# Altium PCB BuySellDisplay4.PcbDoc (part 3 of 3)
Units mm, origin at the board's own origin, x right, y up, seen from the top; angles counter-clockwise.
Board outline 355.85 x 151.13 mm, 2 copper layers (Top Layer, Bottom Layer); 219 components, 209 nets, 584 pads, 68 vias.
Unrouted connection lines stored in the file: 3.
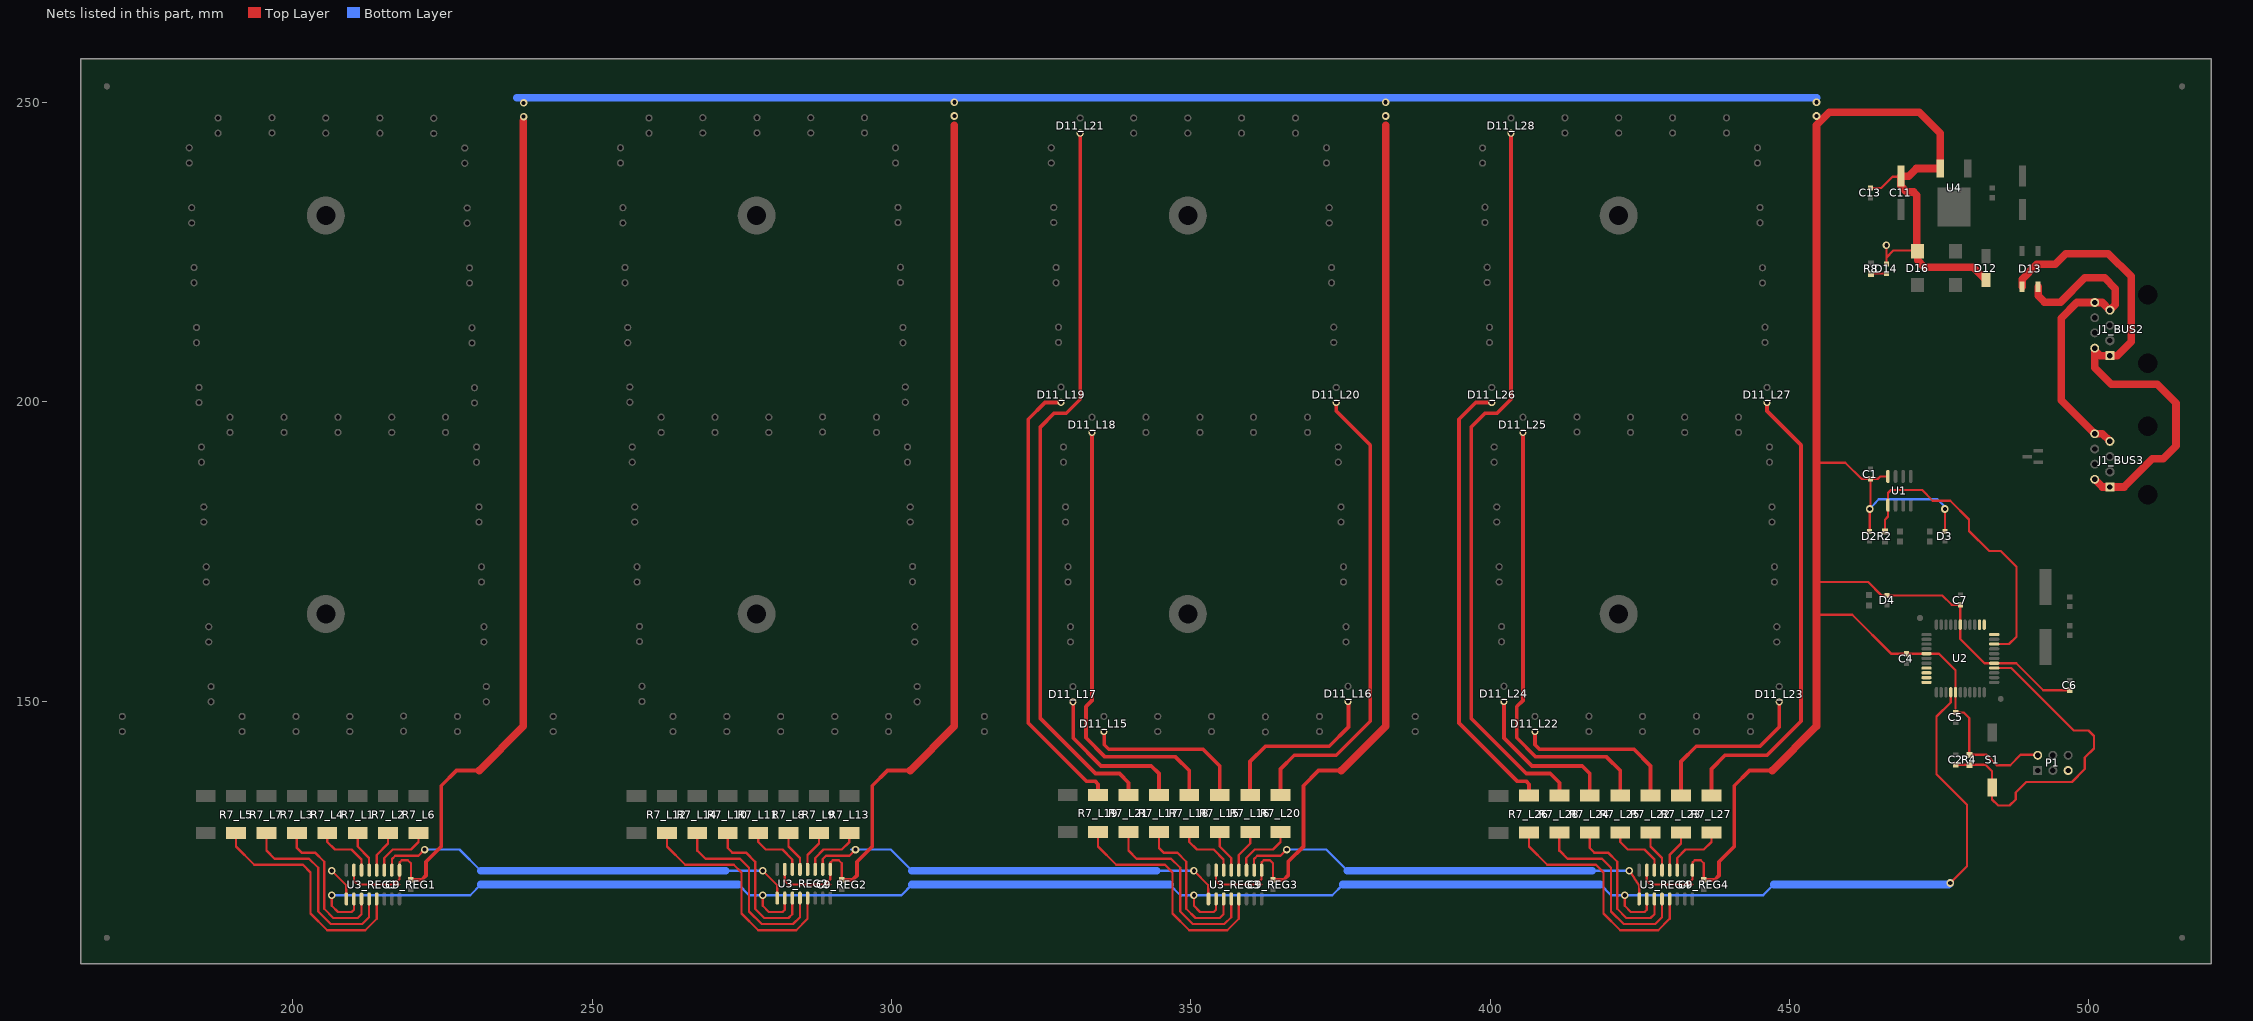
[diagram p3: the nets of this part, all layers, seen from the top]

## Via types
v1: diameter 1.27, hole 0.711, Top Layer to Bottom Layer, 68 vias

## Nets (pads, with @x,y where several pads share a name; then routed paths per layer and width w, separated by ;. In a path a pad name is that pad's centre, name@x,y a point inside that pad or via, vN(x,y) a via of type N, cw(c..) or ccw(c..) an arc to the next point about the centre after c; other vN are vias at no path point) (continued)
NetD11_L15_K: D11_L15.K R7_L15.1 | length 28
  Top Layer w0.635: D11_L15.K@335.534,144.932 335.534,142.748 336.296,141.986 352.044,141.986 354.838,139.192 R7_L15.1@354.838,134.164
NetD11_L16_K: D11_L16.K R7_L16.1 | length 28.8
  Top Layer w0.635: R7_L16.1@359.918,134.164 359.918,139.954 362.458,142.494 373.126,142.494 376.326,145.694 D11_L16.K@376.326,149.911
NetD11_L17_K: D11_L17.K R7_L17.1 | length 26.6
  Top Layer w0.635: D11_L17.K@330.352,149.911 330.352,143.866 335.026,139.192 343.408,139.192 344.678,137.922 R7_L17.1@344.678,134.164
NetD11_L18_K: D11_L18.K R7_L18.1 | length 75.2
  Top Layer w0.635: D11_L18.K@333.502,194.92 333.502,150.114 332.486,149.098 332.486,143.891 335.661,140.716 347.472,140.716 349.758,138.43 R7_L18.1@349.758,134.164
NetD11_L19_K: D11_L19.K R7_L19.1 | length 75.3
  Top Layer w0.635: D11_L19.K@328.32,199.898 325.628,199.898 322.834,197.104 322.834,146.355 332.537,136.652 334.01,136.652 334.518,136.144 R7_L19.1@334.518,134.164
NetD11_L20_K: D11_L20.K R7_L20.1 | length 78.4
  Top Layer w0.635: R7_L20.1@364.998,134.164 364.998,138.684 367.284,140.97 374.294,140.97 379.984,146.66 379.984,192.786 374.294,198.476 D11_L20.K@374.294,199.898
NetD11_L21_K: D11_L21.K R7_L21.1 | length 123.1
  Top Layer w0.635: D11_L21.K@331.521,244.907 331.521,200.457 329.184,198.12 327.152,198.12 324.866,195.834 324.866,147.117 334.061,137.922 338.074,137.922 339.598,136.398 R7_L21.1@339.598,134.164
NetD11_L22_K: D11_L22.K R7_L22.1 | length 28
  Top Layer w0.635: D11_L22.K@407.518,144.932 407.518,142.748 408.28,141.986 424.028,141.986 426.822,139.192 R7_L22.1@426.822,134.164
NetD11_L23_K: D11_L23.K R7_L23.1 | length 28.8
  Top Layer w0.635: R7_L23.1@431.902,134.164 431.902,139.954 434.442,142.494 445.11,142.494 448.31,145.694 D11_L23.K@448.31,149.911
NetD11_L24_K: D11_L24.K R7_L24.1 | length 26.6
  Top Layer w0.635: D11_L24.K@402.336,149.911 402.336,143.866 407.01,139.192 415.392,139.192 416.662,137.922 R7_L24.1@416.662,134.164
NetD11_L25_K: D11_L25.K R7_L25.1 | length 75.2
  Top Layer w0.635: D11_L25.K@405.486,194.92 405.486,150.114 404.47,149.098 404.47,143.891 407.645,140.716 419.456,140.716 421.742,138.43 R7_L25.1@421.742,134.164
NetD11_L26_K: D11_L26.K R7_L26.1 | length 75.3
  Top Layer w0.635: D11_L26.K@400.304,199.898 397.612,199.898 394.818,197.104 394.818,146.355 404.52,136.652 405.994,136.652 406.502,136.144 R7_L26.1@406.502,134.164
NetD11_L27_K: D11_L27.K R7_L27.1 | length 78.4
  Top Layer w0.635: R7_L27.1@436.982,134.164 436.982,138.684 439.268,140.97 446.278,140.97 451.968,146.66 451.968,192.786 446.278,198.476 D11_L27.K@446.278,199.898
NetD11_L28_K: D11_L28.K R7_L28.1 | length 123.1
  Top Layer w0.635: D11_L28.K@403.504,244.907 403.504,200.457 401.168,198.12 399.136,198.12 396.85,195.834 396.85,147.117 406.044,137.922 410.058,137.922 411.582,136.398 R7_L28.1@411.582,134.164
NetD14_1: D14.1 R8.1 | length 2.5
  Top Layer w0.381: R8.1@463.727,221.45 D14.1@466.217,221.45
NetU3_REG1_2: U3_REG1.2 U3_REG2.9 | length 71.4
  Top Layer w0.381: U3_REG1.2@216.535,121.78 216.535,123.658 217.083,124.206 220.98,124.206 v1(221.996,125.222) ; v1(278.486,121.666) 280.899,119.253 U3_REG2.9@280.899,116.98
  Bottom Layer w0.381: v1(221.996,125.222) 227.838,125.222 231.394,121.666 ; 272.542,121.666 v1(278.486,121.666)
  Bottom Layer w1.27: 231.394,121.666 272.288,121.666
NetU3_REG2_2: U3_REG2.2 U3_REG3.9 | length 72.1
  Top Layer w0.381: U3_REG2.2@288.519,121.78 288.519,123.658 289.066,124.206 292.964,124.206 v1(293.98,125.222) ; v1(350.52,121.666) 352.933,119.253 U3_REG3.9@352.933,116.98
  Bottom Layer w0.381: 293.268,125.222 299.872,125.222 303.428,121.666 ; 344.576,121.666 v1(350.52,121.666)
  Bottom Layer w1.27: 303.428,121.666 344.322,121.666
NetU3_REG3_2: U3_REG3.2 U3_REG4.9 | length 71.7
  Top Layer w0.381: U3_REG3.2@360.553,121.78 360.553,123.658 361.101,124.206 364.998,124.206 v1(366.014,125.222) ; v1(423.266,121.666) 424.917,119.253 U3_REG4.9@424.917,116.98
  Bottom Layer w0.381: v1(366.014,125.222) 372.618,125.222 376.174,121.666 ; 417.322,121.666 v1(423.266,121.666)
  Bottom Layer w1.27: 376.174,121.666 417.068,121.666
OUTPUT: U3_REG1.9 | length 5.7
  Top Layer w0.381: v1(206.502,121.666) 208.915,119.253 U3_REG1.9@208.915,116.98
PIN_A: U2.33
PIN_B: U2.32
PIN_C: U2.31
PIN_D: U2.30
POWER_V+: D13.1 J1_BUS2.1 J1_BUS2.2 J1_BUS3.1 J1_BUS3.2 | length 84.6
  Top Layer w1.27: D13.1@488.885,219.25 488.885,220.534 491.363,223.012 494.411,223.012 496.189,224.79 503.301,224.79 507.111,220.98 507.111,210.058 504.784,207.731 501.945,207.731 J1_BUS2.2@501.016,208.66 ; J1_BUS3.2@501.015,187.071 502.285,185.801 505.968,185.801 510.667,190.5 512.445,190.5 514.604,192.659 514.604,199.771 511.429,202.946 503.809,202.946 501.016,205.739 J1_BUS2.2@501.016,209.001
POWER_V-: D13.2 J1_BUS2.7 J1_BUS2.8 J1_BUS3.7 J1_BUS3.8 | length 55.7
  Top Layer w1.27: D13.2@491.555,219.25 491.555,217.74 492.633,216.662 495.3,216.662 499.364,220.726 502.666,220.726 504.444,218.948 504.444,216.239 J1_BUS2.7@503.556,215.351 502.286,216.621 498.053,216.621 495.427,213.995 495.427,200.28 J1_BUS3.8@501.015,194.691 502.285,194.691 J1_BUS3.7@503.491,193.484 ; J1_BUS2.8@501.016,216.621 J1_BUS2.8@501.102,216.535
RCK: U2.37 U3_REG1.10 U3_REG2.10 U3_REG3.10 U3_REG4.10 | length 343
  Top Layer w0.381: v1(206.502,117.602) 206.502,115.824 207.518,114.808 209.804,114.808 210.185,115.189 U3_REG1.10@210.185,116.98 ; v1(278.486,117.602) 278.486,115.824 279.502,114.808 281.788,114.808 282.169,115.189 U3_REG2.10@282.169,116.98 ; v1(350.52,117.602) 350.52,115.824 351.536,114.808 353.822,114.808 354.203,115.189 U3_REG3.10@354.203,116.98 ; v1(422.504,117.602) 422.504,115.824 423.52,114.808 425.806,114.808 426.187,115.189 U3_REG4.10@426.187,116.98 ; v1(476.885,119.634) 479.679,122.428 479.679,132.715 474.599,137.795 474.599,147.447 476.954,149.802 U2.37@476.954,151.491
  Bottom Layer w0.381: v1(206.502,117.602) 229.616,117.602 231.394,119.38 ; 274.422,119.38 276.2,117.602 ; 276.25,117.602 301.65,117.602 303.428,119.38 ; 346.456,119.38 348.234,117.602 373.634,117.602 375.412,119.38 ; 418.44,119.38 420.218,117.602 445.618,117.602 447.396,119.38
  Bottom Layer w1.27: 231.394,119.38 274.422,119.38 ; 303.428,119.38 346.456,119.38 ; 375.412,119.38 418.44,119.38 ; 447.396,119.38 476.631,119.38 v1(476.885,119.634)
RO: R2.2 U1.1 U2.9 | length 50.6
  Top Layer w0.381: R2.2@465.963,178.396 465.963,180.34 466.471,180.848 466.471,184.785 466.979,185.293 472.186,185.293 473.964,183.515 476.885,183.515 480.028,180.372 480.028,178.467 483.394,175.101 485.299,175.101 487.934,172.466 487.934,160.782 486.703,159.551 U2.9@484.214,159.551
RST: C2.1 P1.5 R4.1 S1.1 U2.4 | length 58
  Top Layer w0.381: C2.1@477.774,139.408 482.765,139.408 483.87,138.303 S1.1@483.87,135.618 ; S1.1@483.87,135.763 483.87,133.604 484.886,132.588 486.791,132.588 487.807,133.604 487.807,134.747 489.585,136.525 497.205,136.525 499.364,138.684 499.364,140.589 500.888,142.113 500.888,144.196 499.974,145.11 497.51,145.11 487.069,155.551 U2.4@484.214,155.551
SEGA_7SEG1: R7_L7.2 U3_REG1.12 | length 32.9
  Top Layer w0.381: R7_L7.2@195.58,127.964 195.58,125.047 196.929,123.698 202.692,123.698 204.216,122.174 204.216,114.887 206.327,112.776 211.582,112.776 212.725,113.919 U3_REG1.12@212.725,116.98
SEGA_7SEG2: R7_L14.2 U3_REG2.12 | length 32.9
  Top Layer w0.381: R7_L14.2@267.564,127.964 267.564,125.047 268.913,123.698 274.676,123.698 276.2,122.174 276.2,114.887 278.311,112.776 283.566,112.776 284.709,113.919 U3_REG2.12@284.709,116.98
SEGA_7SEG3: R7_L21.2 U3_REG3.12 | length 32.9
  Top Layer w0.381: R7_L21.2@339.598,127.964 339.598,125.047 340.947,123.698 346.71,123.698 348.234,122.174 348.234,114.887 350.345,112.776 355.6,112.776 356.743,113.919 U3_REG3.12@356.743,116.98
SEGA_7SEG4: R7_L28.2 U3_REG4.12 | length 32.9
  Top Layer w0.381: R7_L28.2@411.582,127.964 411.582,125.047 412.931,123.698 418.694,123.698 420.218,122.174 420.218,114.887 422.329,112.776 427.584,112.776 428.727,113.919 U3_REG4.12@428.727,116.98
SEGB_7SEG1: R7_L5.2 U3_REG1.13 | length 39.6
  Top Layer w0.381: R7_L5.2@190.5,127.964 190.5,125.73 193.548,122.682 201.676,122.682 202.946,121.412 202.946,114.554 205.74,111.76 212.09,111.76 213.995,113.665 U3_REG1.13@213.995,116.98
SEGB_7SEG2: R7_L12.2 U3_REG2.13 | length 39.6
  Top Layer w0.381: R7_L12.2@262.484,127.964 262.484,125.73 265.532,122.682 273.66,122.682 274.93,121.412 274.93,114.554 277.724,111.76 284.074,111.76 285.979,113.665 U3_REG2.13@285.979,116.98
SEGB_7SEG3: R7_L19.2 U3_REG3.13 | length 39.6
  Top Layer w0.381: R7_L19.2@334.518,127.964 334.518,125.73 337.566,122.682 345.694,122.682 346.964,121.412 346.964,114.554 349.758,111.76 356.108,111.76 358.013,113.665 U3_REG3.13@358.013,116.98
SEGB_7SEG4: R7_L26.2 U3_REG4.13 | length 39.6
  Top Layer w0.381: R7_L26.2@406.502,127.964 406.502,125.73 409.55,122.682 417.678,122.682 418.948,121.412 418.948,114.554 421.742,111.76 428.092,111.76 429.997,113.665 U3_REG4.13@429.997,116.98
SEGC_7SEG1: R7_L6.2 U3_REG1.3 | length 10.3
  Top Layer w0.381: U3_REG1.3@215.265,121.78 215.265,123.825 216.662,125.222 219.71,125.222 220.98,126.492 R7_L6.2@220.98,127.964
SEGC_7SEG2: R7_L13.2 U3_REG2.3 | length 10.3
  Top Layer w0.381: U3_REG2.3@287.249,121.78 287.249,123.825 288.646,125.222 291.694,125.222 292.964,126.492 R7_L13.2@292.964,127.964
SEGC_7SEG3: R7_L20.2 U3_REG3.3 | length 10.3
  Top Layer w0.381: U3_REG3.3@359.283,121.78 359.283,123.825 360.68,125.222 363.728,125.222 364.998,126.492 R7_L20.2@364.998,127.964
SEGC_7SEG4: R7_L27.2 U3_REG4.3 | length 10.3
  Top Layer w0.381: U3_REG4.3@431.267,121.78 431.267,123.825 432.664,125.222 435.712,125.222 436.982,126.492 R7_L27.2@436.982,127.964
SEGD_7SEG1: R7_L4.2 U3_REG1.6 | length 10.2
  Top Layer w0.381: R7_L4.2@205.74,127.964 205.74,126.492 207.01,125.222 209.804,125.222 211.455,123.571 U3_REG1.6@211.455,121.78
SEGD_7SEG2: R7_L11.2 U3_REG2.6 | length 10.2
  Top Layer w0.381: R7_L11.2@277.724,127.964 277.724,126.492 278.994,125.222 281.788,125.222 283.439,123.571 U3_REG2.6@283.439,121.78
SEGD_7SEG3: R7_L18.2 U3_REG3.6 | length 10.2
  Top Layer w0.381: R7_L18.2@349.758,127.964 349.758,126.492 351.028,125.222 353.822,125.222 355.473,123.571 U3_REG3.6@355.473,121.78
SEGD_7SEG4: R7_L25.2 U3_REG4.6 | length 10.2
  Top Layer w0.381: R7_L25.2@421.742,127.964 421.742,126.492 423.012,125.222 425.806,125.222 427.457,123.571 U3_REG4.6@427.457,121.78
SEGE_7SEG1: R7_L3.2 U3_REG1.11 | length 25.6
  Top Layer w0.381: R7_L3.2@200.66,127.964 200.66,125.476 201.422,124.714 203.708,124.714 205.232,123.19 205.232,115.316 206.756,113.792 210.82,113.792 211.455,114.427 U3_REG1.11@211.455,116.98
SEGE_7SEG2: R7_L10.2 U3_REG2.11 | length 25.6
  Top Layer w0.381: R7_L10.2@272.644,127.964 272.644,125.476 273.406,124.714 275.692,124.714 277.216,123.19 277.216,115.316 278.74,113.792 282.804,113.792 283.439,114.427 U3_REG2.11@283.439,116.98
SEGE_7SEG3: R7_L17.2 U3_REG3.11 | length 25.6
  Top Layer w0.381: R7_L17.2@344.678,127.964 344.678,125.476 345.44,124.714 347.726,124.714 349.25,123.19 349.25,115.316 350.774,113.792 354.838,113.792 355.473,114.427 U3_REG3.11@355.473,116.98
SEGE_7SEG4: R7_L24.2 U3_REG4.11 | length 25.6
  Top Layer w0.381: R7_L24.2@416.662,127.964 416.662,125.476 417.424,124.714 419.71,124.714 421.234,123.19 421.234,115.316 422.758,113.792 426.822,113.792 427.457,114.427 U3_REG4.11@427.457,116.98
SEGF_7SEG1: R7_L2.2 U3_REG1.4 | length 7
  Top Layer w0.381: U3_REG1.4@213.995,121.78 213.995,124.333 215.9,126.238 R7_L2.2@215.9,127.964
SEGF_7SEG2: R7_L9.2 U3_REG2.4 | length 7
  Top Layer w0.381: U3_REG2.4@285.979,121.78 285.979,124.333 287.884,126.238 R7_L9.2@287.884,127.964
SEGF_7SEG3: R7_L16.2 U3_REG3.4 | length 7
  Top Layer w0.381: U3_REG3.4@358.013,121.78 358.013,124.333 359.918,126.238 R7_L16.2@359.918,127.964
SEGF_7SEG4: R7_L23.2 U3_REG4.4 | length 7
  Top Layer w0.381: U3_REG4.4@429.997,121.78 429.997,124.333 431.902,126.238 R7_L23.2@431.902,127.964
SEGG_7SEG1: R7_L1.2 U3_REG1.5 | length 7
  Top Layer w0.381: R7_L1.2@210.82,127.964 210.82,125.73 212.725,123.825 U3_REG1.5@212.725,121.78
SEGG_7SEG2: R7_L8.2 U3_REG2.5 | length 7
  Top Layer w0.381: R7_L8.2@282.804,127.964 282.804,125.73 284.709,123.825 U3_REG2.5@284.709,121.78
SEGG_7SEG3: R7_L15.2 U3_REG3.5 | length 7
  Top Layer w0.381: R7_L15.2@354.838,127.964 354.838,125.73 356.743,123.825 U3_REG3.5@356.743,121.78
SEGG_7SEG4: R7_L22.2 U3_REG4.5 | length 7
  Top Layer w0.381: R7_L22.2@426.822,127.964 426.822,125.73 428.727,123.825 U3_REG4.5@428.727,121.78
TCP_RESET: U2.13
USART1_RX: U2.11
USART1_TX: U2.12
VCC: C1.1 C4.1 C5.1 C6.1 C7.1 C9_REG1.1 C9_REG2.1 C9_REG3.1 C9_REG4.1 C11.1 C13.1 D2.2 D3.2 D4.2 D12.2 D14.2 D16.1 P1.2 R4.2 U1.8 U2.5 U2.17 U2.27 U2.38 U3_REG1.1 U3_REG1.7 U3_REG2.1 U3_REG2.7 U3_REG3.1 U3_REG3.7 U3_REG4.1 U3_REG4.7 U4.3 | length 1069.8
  Top Layer w0.381: U3_REG1.7@210.185,121.78 210.185,120.015 210.82,119.38 217.767,119.38 ; 216.916,119.38 217.805,120.269 217.805,123.063 218.186,123.444 219.202,123.444 219.71,122.936 C9_REG1.1@219.71,120.18 ; U3_REG2.7@282.169,121.78 282.169,120.015 282.804,119.38 289.751,119.38 ; 288.9,119.38 289.789,120.269 289.789,123.063 290.17,123.444 291.186,123.444 291.694,122.936 C9_REG2.1@291.694,120.18 ; U3_REG3.7@354.203,121.78 354.203,120.015 354.838,119.38 361.785,119.38 ; 360.934,119.38 361.823,120.269 361.823,123.063 362.204,123.444 363.22,123.444 363.728,122.936 C9_REG3.1@363.728,120.18 ; U3_REG4.7@426.187,121.78 426.187,120.015 426.822,119.38 433.769,119.38 ; 432.918,119.38 433.807,120.269 433.807,123.063 434.188,123.444 435.204,123.444 435.712,122.936 C9_REG4.1@435.712,120.18 ; 454.533,169.926 463.169,169.926 465.417,167.678 475.552,167.678 477.114,166.116 478.564,166.116 U2.17@478.564,162.801 ; 454.533,189.865 459.359,189.865 462.064,187.16 464.795,187.16 465.201,187.566 U1.8@466.471,187.566 ; 454.66,164.465 460.502,164.465 467.052,157.915 C4.1@469.568,157.915 ; D2.2@463.423,178.346 v1(463.423,182.118) ; v1@463.55,182.245 C1.1@463.55,187.16 ; C13.1@463.55,235.75 465.366,235.75 467.233,237.617 C11.1@468.63,237.617 ; D14.2@466.217,222.885 466.217,224.155 467.36,225.298 D16.1@471.424,225.298 ; D14.2@466.217,223.05 v1(466.217,226.187) ; C4.1@469.568,157.951 475.017,157.951 477.774,155.194 U2.38@477.774,151.501 ; D3.2@475.996,178.346 v1(475.996,182.118) ; 477.764,148.779 U2.38@477.764,151.501 ; C5.1@477.774,148.12 479.133,148.12 480.06,147.193 R4.2@480.06,141.058 482.917,141.058 484.656,139.319 486.894,139.319 488.633,141.058 P1.2@491.49,141.058 ; U2.17@478.55,162.941 478.55,160.387 482.6,156.337 U2.5@484.378,156.337 ; U2.5@484.214,156.351 487.92,156.351 492.417,151.854 C6.1@496.824,151.854
  Top Layer w0.635: C9_REG1.1@219.71,120.18 221.526,120.18 222.25,120.904 222.25,123.19 224.79,125.73 224.79,135.89 227.33,138.43 231.14,138.43 ; C9_REG2.1@291.694,120.18 293.51,120.18 294.234,120.904 294.234,123.19 296.774,125.73 296.774,135.89 299.314,138.43 303.124,138.43 ; C9_REG3.1@363.728,120.18 365.544,120.18 366.268,120.904 366.268,123.19 368.808,125.73 368.808,135.89 371.348,138.43 375.158,138.43 ; C9_REG4.1@435.712,120.18 437.528,120.18 438.252,120.904 438.252,123.19 440.792,125.73 440.792,135.89 443.332,138.43 447.142,138.43
  Top Layer w1.27: 231.14,138.43 238.506,145.796 238.506,247.015 ; 303.124,138.43 310.515,145.821 310.515,246.253 ; 375.158,138.43 382.549,145.821 382.549,246.253 ; 447.142,138.43 454.533,145.821 454.533,246.253 456.692,248.412 471.678,248.412 475.234,244.856 U4.3@475.234,239.268 ; D16.1@471.297,225.171 471.297,234.569 470.789,235.077 469.646,235.077 468.63,236.093 C11.1@468.63,237.744 469.928,237.744 471.184,239 U4.3@475.23,239 ; D16.1@471.424,225.044 471.424,223.647 472.567,222.504 480.695,222.504 D12.2@482.727,220.472
  Bottom Layer w0.381: v1(463.423,182.118) 464.947,183.769 474.726,183.769 475.996,182.499 v1(475.996,182.118)
  Bottom Layer w1.27: 237.363,250.825 454.533,250.825
  other v1: 238.531,247.675 310.515,247.777 382.549,247.777 454.533,247.777 238.531,249.961 310.515,250.063 382.549,250.063 454.533,250.063
pads on no net: J1_BUS2.3 J1_BUS2.5 J1_BUS2.MH1 J1_BUS2.MH2 J1_BUS3.3 J1_BUS3.5 J1_BUS3.MH1 J1_BUS3.MH2 U2.15 U2.16 U2.19 U2.20 U2.21 U2.23 U2.24 U2.25 U2.26 U2.29 U2.34 U2.35 U2.36 U2.40 U2.41 U2.42 U2.43 U2.44
copper on no net: | length 2906
  Top Layer w0.254: 10,619.5 19,619.5 ; 10,629.5 19,629.5 ; 10,639.5 19,639.5 ; 10,654.5 16,654.5 16,550.5 ; 12,554.5 20,554.5 ; 12,569.5 21,569.5 ; 12,579.5 21,579.5 ; 12,589.5 21,589.5 ; 14,604.5 18,604.5 ; 18,649.5 10,649.5 10,609.5 19,609.5 ; 20,599.5 12,599.5 12,559.5 21,559.5 ; 21,657.5 21,649.5 57,649.5 57,656.5 ; 23,606.5 23,599.5 59,599.5 59,606.5 ; 25,556.5 25,549.5 61,549.5 61,556.5 ; 61,619.5 70,619.5 ; 61,629.5 70,629.5 ; 61,639.5 70,639.5 ; 61,649.5 70,649.5 70,609.5 62,609.5 ; 62,654.5 66,654.5 66,554.5 ; 63,569.5 72,569.5 ; 63,579.5 72,579.5 ; 63,589.5 72,589.5 ; 63,599.5 72,599.5 72,559.5 64,559.5 ; 64,604.5 70,604.5 ; 75,554.5 79,554.5 ; 77,551.5 77,557.5 ; 82,619.5 91,619.5 ; 82,629.5 91,629.5 ; 82,639.5 91,639.5 ; 82,654.5 88,654.5 88,550.5 ; 84,554.5 92,554.5 ; 84,569.5 93,569.5 ; 84,579.5 93,579.5 ; 84,589.5 93,589.5 ; 86,604.5 90,604.5 ; 90,649.5 82,649.5 82,609.5 91,609.5 ; 92,599.5 84,599.5 84,559.5 93,559.5 ; 93,657.5 93,649.5 129,649.5 129,656.5 ; 95,606.5 95,599.5 131,599.5 131,606.5 ; 97,556.5 97,549.5 133,549.5 133,556.5 ; 133,619.5 142,619.5 ; 133,629.5 142,629.5 ; 133,639.5 142,639.5 ; 133,649.5 142,649.5 142,609.5 134,609.5 ; 134,654.5 138,654.5 138,554.5 ; 135,569.5 144,569.5 ; 135,579.5 144,579.5 ; 135,589.5 144,589.5 ; 135,599.5 144,599.5 144,559.5 136,559.5 ; 136,604.5 142,604.5 ; 147,554.5 151,554.5 ; 149,551.5 149,557.5 ; 154,619.5 163,619.5 ; 154,629.5 163,629.5 ; 154,639.5 163,639.5 ; 154,654.5 160,654.5 160,550.5 ; 156,554.5 164,554.5 ; 156,569.5 165,569.5 ; 156,579.5 165,579.5 ; 156,589.5 165,589.5 ; 158,604.5 162,604.5 ; 162,649.5 154,649.5 154,609.5 163,609.5 ; 164,599.5 156,599.5 156,559.5 165,559.5 ; 165,657.5 165,649.5 201,649.5 201,656.5 ; 167,606.5 167,599.5 203,599.5 203,606.5 ; 169,556.5 169,549.5 205,549.5 205,556.5 ; 205,619.5 214,619.5 ; 205,629.5 214,629.5 ; 205,639.5 214,639.5 ; 205,649.5 214,649.5 214,609.5 206,609.5 ; 206,654.5 210,654.5 210,554.5 ; 207,569.5 216,569.5 ; 207,579.5 216,579.5 ; 207,589.5 216,589.5 ; 207,599.5 216,599.5 216,559.5 208,559.5 ; 208,604.5 214,604.5 ; 236,420 245,420 ; 236,430 245,430 ; 236,440 245,440 ; 236,455 242,455 242,351 ; 238,355 246,355 ; 238,370 247,370 ; 238,380 247,380 ; 238,390 247,390 ; 240,405 244,405 ; 244,450 236,450 236,410 245,410 ; 246,400 238,400 238,360 247,360 ; 247,458 247,450 283,450 283,457 ; 249,407 249,400 285,400 285,407 ; 251,357 251,350 287,350 287,357 ; 287,420 296,420 ; 287,430 296,430 ; 287,440 296,440 ; 287,450 296,450 296,410 288,410 ; 288,455 292,455 292,355 ; 289,370 298,370 ; 289,380 298,380 ; 289,390 298,390 ; 289,400 298,400 298,360 290,360 ; 290,405 296,405 ; 301,355 305,355 ; 303,352 303,358

## Polygon pours and split planes (outlines as drawn)
GND on Top Layer "Top Layer-No Net" (solid): 166.909,254.725 170.909,254.725 170.909,250.725 166.909,250.725
GND on Top Layer "Top Layer-No Net" (solid): 453.898,257.302 520.446,257.302 520.446,106.172 164.592,106.172 164.592,132.08 446.024,132.08 453.898,139.954
VCC on Top Layer "Top Layer-No Net" (solid): 236.753,251.358 240.309,251.358 240.309,247.04 239.293,246.024 237.769,246.024 236.753,247.04
EXTSUPP on Top Layer "Top Layer-No Net" (solid, pour order 1015): 479.755,250.19 479.704,250.19 477.114,252.781 482.397,252.781
EXTSUPP on Top Layer "Top Layer-No Net" (solid, pour order 1015): 300.685,250.19 300.634,250.19 298.044,252.781 303.327,252.781
EXTSUPP on Top Layer "Top Layer-No Net" (solid, pour order 1014): 298.552,247.345 301.244,250.038 301.244,244.653
EXTSUPP on Top Layer "Top Layer-No Net" (solid, pour order 1013): 297.485,245.262 300.177,247.955 297.485,247.955
EXTSUPP on Top Layer "Top Layer-No Net" (solid, pour order 1012): 254.66,250.088 251.968,252.781 257.302,252.781
EXTSUPP on Top Layer "Top Layer-No Net" (solid, pour order 1011): 244.5,250.088 241.808,252.781 247.193,252.781
EXTSUPP on Top Layer "Top Layer-No Net" (solid, pour order 1010): 297.485,203.149 294.792,200.457 297.485,200.457
EXTSUPP on Top Layer "Top Layer-No Net" (solid, pour order 1009): 299.314,193.904 302.006,196.596 299.314,196.596
EXTSUPP on Top Layer "Top Layer-No Net" (solid, pour order 1008): 300.076,198.73 297.383,201.422 297.383,198.73
VCC on Top Layer "Top Layer-No Net" (solid): 308.737,251.46 312.293,251.46 312.293,247.142 311.277,246.126 309.753,246.126 308.737,247.142
EXTSUPP on Top Layer "Top Layer-No Net" (solid, pour order 1015): 372.72,250.19 372.669,250.19 370.078,252.781 375.361,252.781
EXTSUPP on Top Layer "Top Layer-No Net" (solid, pour order 1014): 370.586,247.345 373.278,250.038 373.278,244.653
EXTSUPP on Top Layer "Top Layer-No Net" (solid, pour order 1013): 369.519,245.262 372.212,247.955 369.519,247.955
EXTSUPP on Top Layer "Top Layer-No Net" (solid, pour order 1012): 326.695,250.088 324.002,252.781 329.336,252.781
EXTSUPP on Top Layer "Top Layer-No Net" (solid, pour order 1011): 316.535,250.088 313.842,252.781 319.227,252.781
EXTSUPP on Top Layer "Top Layer-No Net" (solid, pour order 1010): 369.519,203.149 366.827,200.457 369.519,200.457
EXTSUPP on Top Layer "Top Layer-No Net" (solid, pour order 1009): 371.348,193.904 374.04,196.596 371.348,196.596
EXTSUPP on Top Layer "Top Layer-No Net" (solid, pour order 1008): 372.11,198.73 369.418,201.422 369.418,198.73
VCC on Top Layer "Top Layer-No Net" (solid): 380.771,251.46 384.327,251.46 384.327,247.142 383.311,246.126 381.787,246.126 380.771,247.142
VCC on Top Layer "Top Layer-No Net" (solid): 452.755,251.46 456.311,251.46 456.311,247.142 455.295,246.126 453.771,246.126 452.755,247.142
VCC on Top Layer "Top Layer-No Net" (solid, pour order 1015): 456.489,164.465 456.489,164.414 453.898,161.823 453.898,167.107
VCC on Top Layer "Top Layer-No Net" (solid, pour order 1015): 456.489,169.926 456.489,169.875 453.898,167.284 453.898,172.568
VCC on Top Layer "Top Layer-No Net" (solid, pour order 1015): 456.565,189.865 456.565,189.814 453.974,187.223 453.974,192.507
A on Top Layer "Top Layer-No Net" (solid): 489.204,187.579 491.556,189.931 498.668,189.931 498.729,189.992 496.316,187.579
B on Top Layer "Top Layer-No Net" (solid): 491.556,191.831 498.922,191.831 496.255,194.498 488.889,194.498
GND on Top Layer "Top Layer-No Net" (solid, pour order 1002): 482.092,193.675 488.378,193.675 488.378,188.341 482.092,188.341
EXTSUPP on Top Layer "Top Layer-No Net" (solid, pour order 1000): 228.702,250.19 228.651,250.19 226.06,252.781 231.343,252.781
EXTSUPP on Top Layer "Top Layer-No Net" (solid, pour order 1001): 226.568,247.345 229.26,250.038 229.26,244.653
EXTSUPP on Top Layer "Top Layer-No Net" (solid, pour order 1002): 225.501,245.262 228.194,247.955 225.501,247.955
EXTSUPP on Top Layer "Top Layer-No Net" (solid, pour order 1003): 182.677,250.088 179.984,252.781 185.318,252.781
EXTSUPP on Top Layer "Top Layer-No Net" (solid, pour order 1005): 225.501,203.149 222.809,200.457 225.501,200.457
EXTSUPP on Top Layer "Top Layer-No Net" (solid, pour order 1006): 227.33,193.904 230.022,196.596 227.33,196.596
EXTSUPP on Top Layer "Top Layer-No Net" (solid, pour order 1007): 228.092,198.73 225.4,201.422 225.4,198.73
EXTSUPP on Top Layer "Top Layer-No Net" (solid, pour order 1008): 444.094,198.73 441.401,201.422 441.401,198.73
EXTSUPP on Top Layer "Top Layer-No Net" (solid, pour order 1009): 443.332,193.904 446.024,196.596 443.332,196.596
EXTSUPP on Top Layer "Top Layer-No Net" (solid, pour order 1010): 441.503,203.149 438.81,200.457 441.503,200.457
EXTSUPP on Top Layer "Top Layer-No Net" (solid, pour order 1011): 388.518,250.088 385.826,252.781 391.211,252.781
EXTSUPP on Top Layer "Top Layer-No Net" (solid, pour order 1012): 398.678,250.088 395.986,252.781 401.32,252.781
EXTSUPP on Top Layer "Top Layer-No Net" (solid, pour order 1013): 441.503,245.262 444.195,247.955 441.503,247.955
EXTSUPP on Top Layer "Top Layer-No Net" (solid, pour order 1014): 442.57,247.345 445.262,250.038 445.262,244.653
EXTSUPP on Top Layer "Top Layer-No Net" (solid, pour order 1015): 444.703,250.19 444.652,250.19 442.062,252.781 447.345,252.781
GND on Bottom Layer "Top Layer-No Net" (solid): 164.592,257.302 520.446,257.302 520.446,106.172 164.592,106.172
VCC on Bottom Layer "Top Layer-No Net" (solid, pour order 1015): 240.259,248.691 240.208,248.691 237.617,251.282 242.9,251.282
VCC on Bottom Layer "Top Layer-No Net" (solid): 236.753,251.358 240.309,251.358 240.309,247.04 239.293,246.024 237.769,246.024 236.753,247.04
VCC on Bottom Layer "Top Layer-No Net" (solid): 308.737,251.46 312.293,251.46 312.293,247.142 311.277,246.126 309.753,246.126 308.737,247.142
VCC on Bottom Layer "Top Layer-No Net" (solid, pour order 1015): 312.242,248.793 312.191,248.793 309.601,251.384 314.884,251.384
VCC on Bottom Layer "Top Layer-No Net" (solid, pour order 1015): 308.813,248.793 308.762,248.793 306.172,251.384 311.455,251.384
VCC on Bottom Layer "Top Layer-No Net" (solid): 380.771,251.46 384.327,251.46 384.327,247.142 383.311,246.126 381.787,246.126 380.771,247.142
VCC on Bottom Layer "Top Layer-No Net" (solid, pour order 1015): 384.277,248.793 384.226,248.793 381.635,251.384 386.918,251.384
VCC on Bottom Layer "Top Layer-No Net" (solid, pour order 1015): 380.848,248.793 380.797,248.793 378.206,251.384 383.489,251.384
VCC on Bottom Layer "Top Layer-No Net" (solid, pour order 1015): 452.831,248.793 452.78,248.793 450.19,251.384 455.473,251.384
VCC on Bottom Layer "Top Layer-No Net" (solid): 452.755,251.46 456.311,251.46 456.311,247.142 455.295,246.126 453.771,246.126 452.755,247.142

## Silkscreen, mask and mechanical layers (free items; w line width, h text height)
Top Overlay:
  lines w0.254: 3,554.5 7,554.5 ; 5,552.5 5,556.5 ; 18,604.5 64,604.5 ; 75,554.5 79,554.5 ; 77,552.5 77,556.5 ; 90,604.5 136,604.5 ; 93,448 93,348 143,348 142.87,448 ; 100,448 137,448 ; 147,554.5 151,554.5 ; 149,552.5 149,556.5 ; 162,604.5 208,604.5 ; 229,355 233,355 ; 231,353 231,357 ; 244,405 290,405 ; 459.867,162.306 461.518,162.306 ; 459.867,172.339 461.518,172.339 ; 460.375,161.544 460.375,163.195 ; 460.375,163.957 460.375,165.608 ; 460.375,166.37 460.375,168.021 ; 460.375,168.656 460.375,170.307 ; 460.375,171.069 460.375,172.72 ; 460.629,229.235 462.28,229.235 ; 460.756,217.297 462.407,217.297 ; 461.264,216.535 461.264,218.186 ; 461.264,218.948 461.264,220.599 ; 461.264,221.361 461.264,223.012 ; 461.264,223.647 461.264,225.298 ; 461.264,226.06 461.264,227.711 ; 461.264,228.346 461.264,229.997 ; 462.153,162.306 463.804,162.306 ; 462.153,172.339 463.804,172.339 ; 462.153,173.863 462.153,180.848 464.566,180.848 464.566,173.863 ; 462.788,229.235 464.439,229.235 ; 463.042,217.297 464.693,217.297 ; 464.566,162.306 466.217,162.306 ; 464.566,172.339 466.217,172.339 ; 465.201,229.235 466.852,229.235 ; 465.455,217.297 467.106,217.297 ; 466.979,162.306 468.63,162.306 ; 466.979,172.339 468.63,172.339 ; 467.614,229.235 469.265,229.235 ; 467.741,161.544 467.741,163.195 ; 467.741,163.957 467.741,165.608 ; 467.741,166.37 467.741,168.021 ; 467.741,168.656 467.741,170.307 ; 467.741,171.069 467.741,172.72 ; 467.868,217.297 469.519,217.297 ; 468.63,216.535 468.63,218.186 ; 468.63,218.948 468.63,220.599 ; 468.63,221.361 468.63,223.012 ; 468.63,223.647 468.63,225.298 ; 468.63,226.06 468.63,227.711 ; 468.63,228.346 468.63,229.997 ; 474.726,173.863 474.726,180.848 477.139,180.848 477.139,173.863 ; 490.22,136.906 490.22,132.715 497.84,132.715 497.84,136.906 ; 490.22,142.621 490.22,146.812 497.84,146.812 497.84,142.621 ; 492.76,132.715 492.76,136.906 ; 492.887,142.621 492.887,146.812 ; 495.173,132.715 495.173,136.906 ; 495.3,142.621 495.3,146.812 ; 16,654.5 62,654.5 66,554.5 20,554.5 16,654.5 ; 88,654.5 134,654.5 138,554.5 92,554.5 88,654.5 ; 160,654.5 164,554.5 210,554.5 206,654.5 160,654.5 ; 242,455 288,455 292,355 246,355 242,455
  text "GND" at 462.026,227.33 h1.52
  text "+5.0V" at 464.947,227.33 h1.52
  text "RX" at 462.534,174.244 h1.52
  text "TX" at 475.107,174.244 h1.52
  text "Keep Alive" at 461.264,170.561 h1.52 r270
  text "VTG" at 491.871,143.522 h1.52 r90
  text "GND" at 496.875,143.433 h1.52 r90
  text "MOSI" at 494.373,143.027 h1.52 r90
  text "MISO" at 491.871,133.655 h1.52 r90
  text "SCK" at 494.373,133.655 h1.52 r90
  text "RST" at 496.875,133.655 h1.52 r90
  text "ISP6PIN" at 490.55,131.394 h1.52
Mechanical 1:
  drawing of 504 lines, arcs and shapes, not listed
Mechanical 13:
  drawing of 732 lines, arcs and shapes, not listed
Mechanical 15:
  lines w0.254: 0,132.08 519.43,132.08 ; 444.246,130.302 455.676,141.732 ; 453.898,131.064 453.898,514.604

## Dimensions
236,455 to 229,355 on Top Layer
231,353 to 292,355 on Top Layer

## Text inside footprints (layer, text, board x,y; h text height)
C10: Top Overlay "+" at 485.267,240.03 h2.5 r270
C11: Top Overlay "+" at 464.947,240.03 h2.5 r270
D13: Top Overlay "~" at 489.204,220.599 h1.52 r90; Top Overlay "~" at 491.871,220.599 h1.52 r90; Top Overlay "+" at 489.204,223.139 h1.52 r90; Top Overlay "-" at 491.998,223.266 h1.52 r90
P1: Top Overlay "2" at 489.153,140.894 h1.27; Top Overlay "1" at 489.179,138.074 h1.27; Top Overlay "5" at 498.373,138.125 h1.27; Top Overlay "6" at 498.323,140.691 h1.27